# EAGLE board untitled3 (EAGLE 6.5.0)
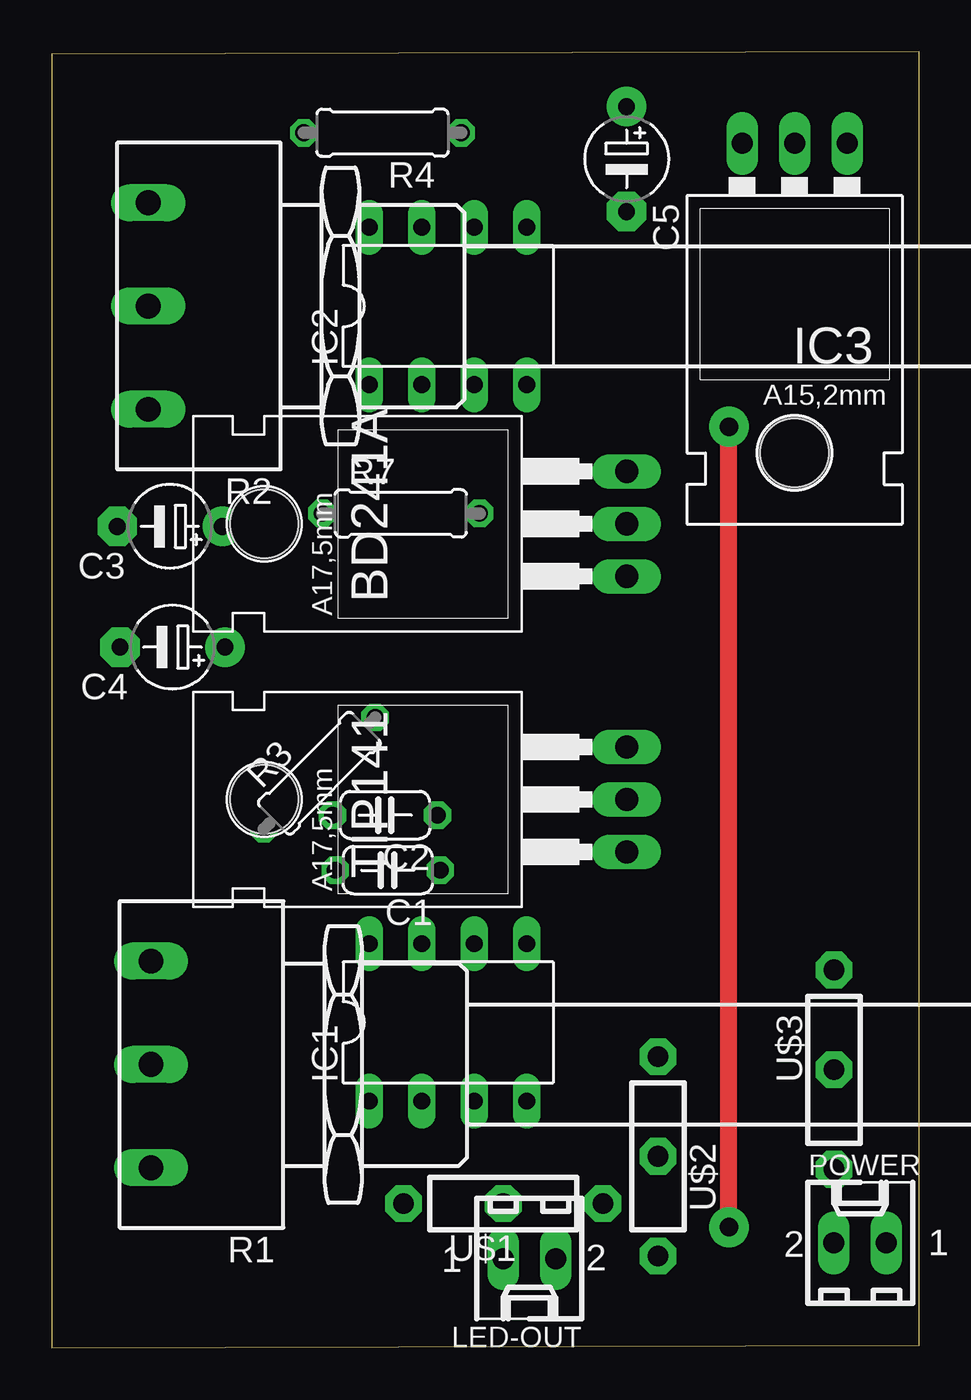
[diagram p0: board, top side]
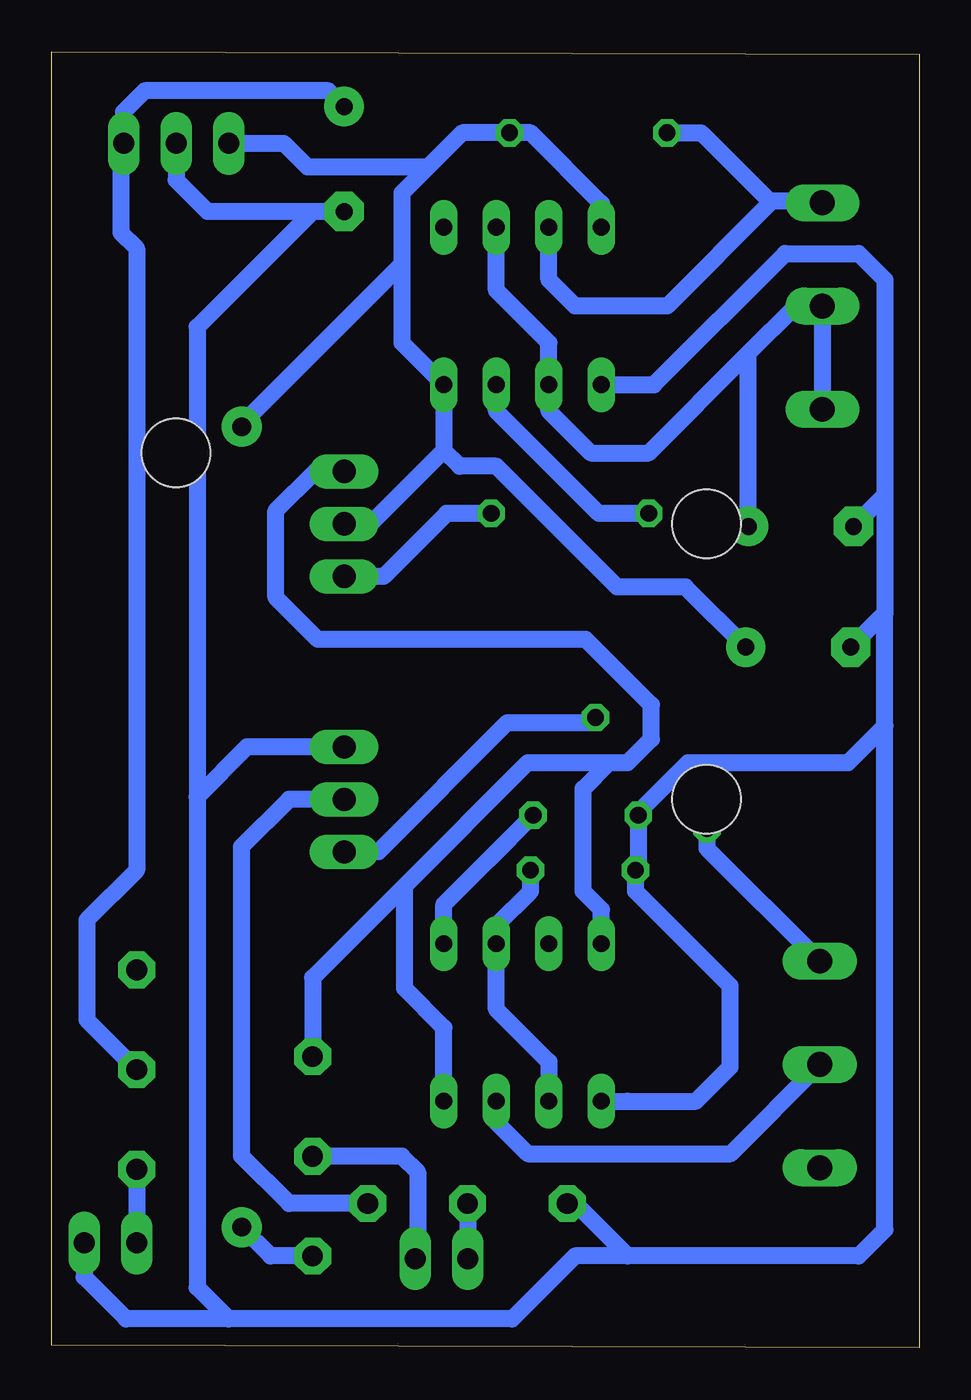
[diagram p1: board, bottom side, seen from below]

Size 41.96 x 62.73 mm. Coordinates in mm from the lower left corner, seen from the top.
Outline: 0,0 41.96,0.13 41.96,62.73 0,62.6 0,0
Copper layers (1*16): Top 0.035mm / dielectric 1.5mm / Bottom 0.035mm
Design rules "default": minimum track width 10mil, minimum drill 24mil, track to track 8mil, track to pad 8mil, pad to pad 8mil, via to via 8mil, smd to smd 8mil, copper to edge 40mil, drill to drill 8mil, minimum pad ring 10mil, minimum via ring 8mil, stop-mask expansion 4mil, vias tented up to drill 0mil, thermal gap 10mil

## Footprints (pad centres in the part's own frame; a part is rotated, then mirrored left to right if it is on the bottom)
TO220 = drill 1.118 long: 1 -2.54,-6.35; 2 0,-6.35; 3 2.54,-6.35 | hole 3.302: 0,11.176
C050-024X044 = drill 0.813 octagon: 1 -2.54,0; 2 2.54,0
E5-4 = drill 0.813 pad 1.905: + -2.54,0 | drill 0.813 pad 1.905 octagon: - 2.54,0
DIL-08 = drill 0.813 long: 1 -3.81,-3.81; 2 -1.27,-3.81; 3 1.27,-3.81; 4 3.81,-3.81; 5 3.81,3.81; 6 1.27,3.81; 7 -1.27,3.81; 8 -3.81,3.81
78XXL = drill 1.016 long: GND 0,-3.81; IN -2.54,-3.81; OUT 2.54,-3.81 | hole 3.302: 0,11.176
6410-02 = drill 1.016 long: 1 1.27,0; 2 -1.27,0
PC16S = drill 1.2 long: 1A -5,6.5; 1E 5,6.5; 1S 0,6.5
0207/7 = drill 0.813 octagon: 1 -3.81,0; 2 3.81,0
CON3 = drill 1 pad 1.778 octagon: P$1 -5.334,0.254; P$2 -0.508,0.254; P$3 4.318,0.254

## Placement (x,y rotation side)
BD241A  BD241A  [TO220]  21.46,39.88 90 top
C1  102  [C050-024X044]  16.26,23.11 180 top
C2  102  [C050-024X044]  16.13,25.78 180 top
C3  1uf  [E5-4]  5.71,39.75 180 top
C4  1000uf  [E5-4]  5.84,33.91 180 top
C5  1uf  [E5-4]  27.81,57.53 270 top
IC1  NE555  [DIL-08]  19.18,15.75 0 top
IC2  NE555  [DIL-08]  19.18,50.42 0 top
IC3  [78XXL]  35.94,54.48 180 top
LED-OUT  22-27-2021-02  [6410-02]  23.11,4.32 180 top
POWER  22-27-2021-02  [6410-02]  39.12,5.08 0 top
R1  PC16S  [PC16S]  11.3,13.72 90 top
R2  PC16S  [PC16S]  11.18,50.42 90 top
R3  10  [0207/7]  12.95,27.81 45 top
R4  10k  [0207/7]  16,58.8 180 top
R7  10  [0207/7]  16.89,40.39 0 top
TIP141  TIP141  [TO220]  21.46,26.54 90 top
U$1  -SLIDERS  [CON3]  22.35,6.73 0 top
U$2  -SLIDERS  [CON3]  29.59,9.78 90 top
U$3  -SLIDERS  [CON3]  37.59,12.95 270 top

## Library data of the parts
BD241A TIP141 = transistor-fet+irf7201
C1 C2 = rcl 2
C3-C5 R3 R4 R7 = rcl-2
IC1 IC2 = st-microelectronics 2
IC3 U$1-U$3 = tango
LED-OUT POWER = con-molex 2
R1 R2 = piher 2

## Nets
+12V: BD241A.2 C4.+ IC2.4 IC2.8 IC3.OUT R4.1 U$2.P$1
GND: C1.2 C2.2 C3.- C4.- C5.- IC1.1 IC2.1 IC3.GND POWER.1 TIP141.3 U$1.P$1
N$1: IC1.3 R1.1S
N$2: LED-OUT.1 U$1.P$2
N$3: R1.1E R3.1
N$4: C2.1 IC1.5
N$5: LED-OUT.2 U$2.P$2
N$6: BD241A.1 R7.2
N$7: IC2.3 R7.1
N$8: R3.2 TIP141.1
N$9: C1.1 IC1.2 IC1.6
N$10: C5.+ IC3.IN U$3.P$2
N$11: POWER.2 U$3.P$3
N$12: TIP141.2 U$1.P$3
N$13: C3.+ IC2.2 IC2.6 R2.1A R2.1S
N$14: IC2.7 R2.1E R4.2
VOUT: BD241A.3 IC1.4 IC1.8 U$2.P$3

## Tracks (layer width: path | path; a pad name or v marks a point on that pad's centre or on a via)
+12V  (via drill 0.6, 0.9 pad 1.42, 0.9 pad 1.93)
  Top 0.813: v32.77,5.84 32.77,44.45 v32.89,44.58
  Bottom 0.813: 23.75,57.15 25.02,55.88 25.02,52.45 | 25.02,52.45 25.02,48.64 IC2.4 22.99,43.43 | IC3.OUT 30.73,58.29 29.59,57.15 23.75,57.15 | IC2.8 15.37,55.37 18.8,58.8 R4.1 22.1,58.8 23.75,57.15 | C4.+ 11.3,36.83 14.6,36.83 20.45,42.67 22.23,42.67 22.99,43.43 | 22.99,43.43 26.54,39.88 BD241A.2 | U$2.P$1 31.37,4.45 v32.77,5.84 | v32.89,44.58 25.02,52.45
GND
  Bottom 0.813: 14.1,11.94 IC1.1 10.79,11.94 9.14,13.59 9.14,17.53 13.72,22.1 C1.2 13.59,23.24 C2.2 13.59,25.91 11.18,28.32 3.43,28.32 1.65,30.1 | 1.65,41.27 1.65,51.69 2.92,52.96 6.48,52.96 12.83,46.61 IC2.1 | 1.65,41.27 1.65,35.56 | 1.65,30.1 1.65,5.71 2.92,4.45 14.1,4.45 | 1.65,30.1 1.65,35.56 | C5.- 29.34,54.99 | 29.34,54.99 34.42,54.99 35.94,56.52 IC3.GND | C3.- 1.65,41.27 | C4.- 1.65,35.56 | 34.93,26.67 34.93,49.4 29.34,54.99 | 34.93,26.67 34.93,2.92 33.4,1.4 | POWER.1 40.39,3.43 38.35,1.4 33.4,1.4 | 33.4,1.4 19.69,1.4 16.64,4.45 14.1,4.45 | TIP141.3 32.51,29.08 34.93,26.67 | U$1.P$1 16.89,7.11 16.76,7.11 14.1,4.45
N$1
  Bottom 0.813: IC1.3 20.45,10.92 18.92,9.4 9.12,9.4 R1.1S
N$2
  Bottom 0.813: U$1.P$2 LED-OUT.1
N$3
  Bottom 0.813: R3.1 10.26,24.17 R1.1E
N$4
  Bottom 0.813: 20.83,23.62 C2.1 22.99,21.46 IC1.5
N$5
  Bottom 0.813: U$2.P$2 25.02,9.27 24.26,8.51 24.26,4.45 LED-OUT.2
N$6
  Bottom 0.813: R7.2 22.86,40.39 25.91,37.34 BD241A.1
N$7
  Bottom 0.813: R7.1 15.49,40.39 20.45,45.34 IC2.3
N$8
  Bottom 0.813: TIP141.1 26.16,24 19.91,30.25 15.9,30.25 R3.2
N$9
  Bottom 0.813: IC1.2 17.91,13.84 20.45,16.38 IC1.6 20.45,20.45 18.8,22.1 C1.1
N$10
  Bottom 0.813: C5.+ 28.58,60.83 37.47,60.83 38.48,59.82 IC3.IN 38.61,58.17 38.61,53.98 37.85,53.21 37.85,23.11 40.26,20.7 40.26,15.88 U$3.P$2
N$11
  Bottom 0.813: U$3.P$3 POWER.2
N$12
  Bottom 0.813: TIP141.2 30.48,26.54 32.77,24.26 32.77,9.27 30.48,6.98 U$1.P$3
N$13
  Bottom 0.813: IC2.2 17.91,48.64 20.45,51.18 IC2.6 | R2.1A R2.1S 5.97,50.42 8.25,48.13 | 8.25,48.13 13.08,43.31 15.87,43.31 17.91,45.34 IC2.2 | IC2.2 17.91,46.48 | C3.+ 8.25,48.13
N$14
  Bottom 0.813: R2.1E 4.57,55.42 4.57,55.5 | IC2.7 17.91,51.69 16.64,50.42 12.19,50.42 7.17,55.44 | 7.17,55.44 7.11,55.5 4.57,55.5 | 4.5,55.5 4.57,55.5 | R4.2 10.54,58.8 7.17,55.44
N$15  (via drill 0.9 pad 1.93)
  other vias: 32.77,44.58
S$11  (1 unrouted)
VOUT
  Bottom 0.813: 24.89,22.35 24.89,17.4 22.99,15.49 IC1.4 22.99,11.68 | BD241A.3 29.21,42.42 31.12,40.51 31.12,36.32 29.08,34.29 16.13,34.29 12.95,31.12 12.95,29.46 14.1,28.32 14.99,28.32 | 24.89,22.35 18.92,28.32 14.99,28.32 | IC1.8 15.37,21.21 16.26,22.1 16.26,27.05 14.99,28.32 | 24.89,22.35 29.34,17.91 U$2.P$3